# Altium PCB PCB.PcbDoc
Units mil, origin at the board's own origin, x right, y up, seen from the top; angles counter-clockwise.
Board outline 2285 x 2795 mil, 2 copper layers (Top Layer, Bottom Layer); 9 components, 12 nets, 89 pads, 0 vias.
Unrouted connection lines stored in the file: 2.
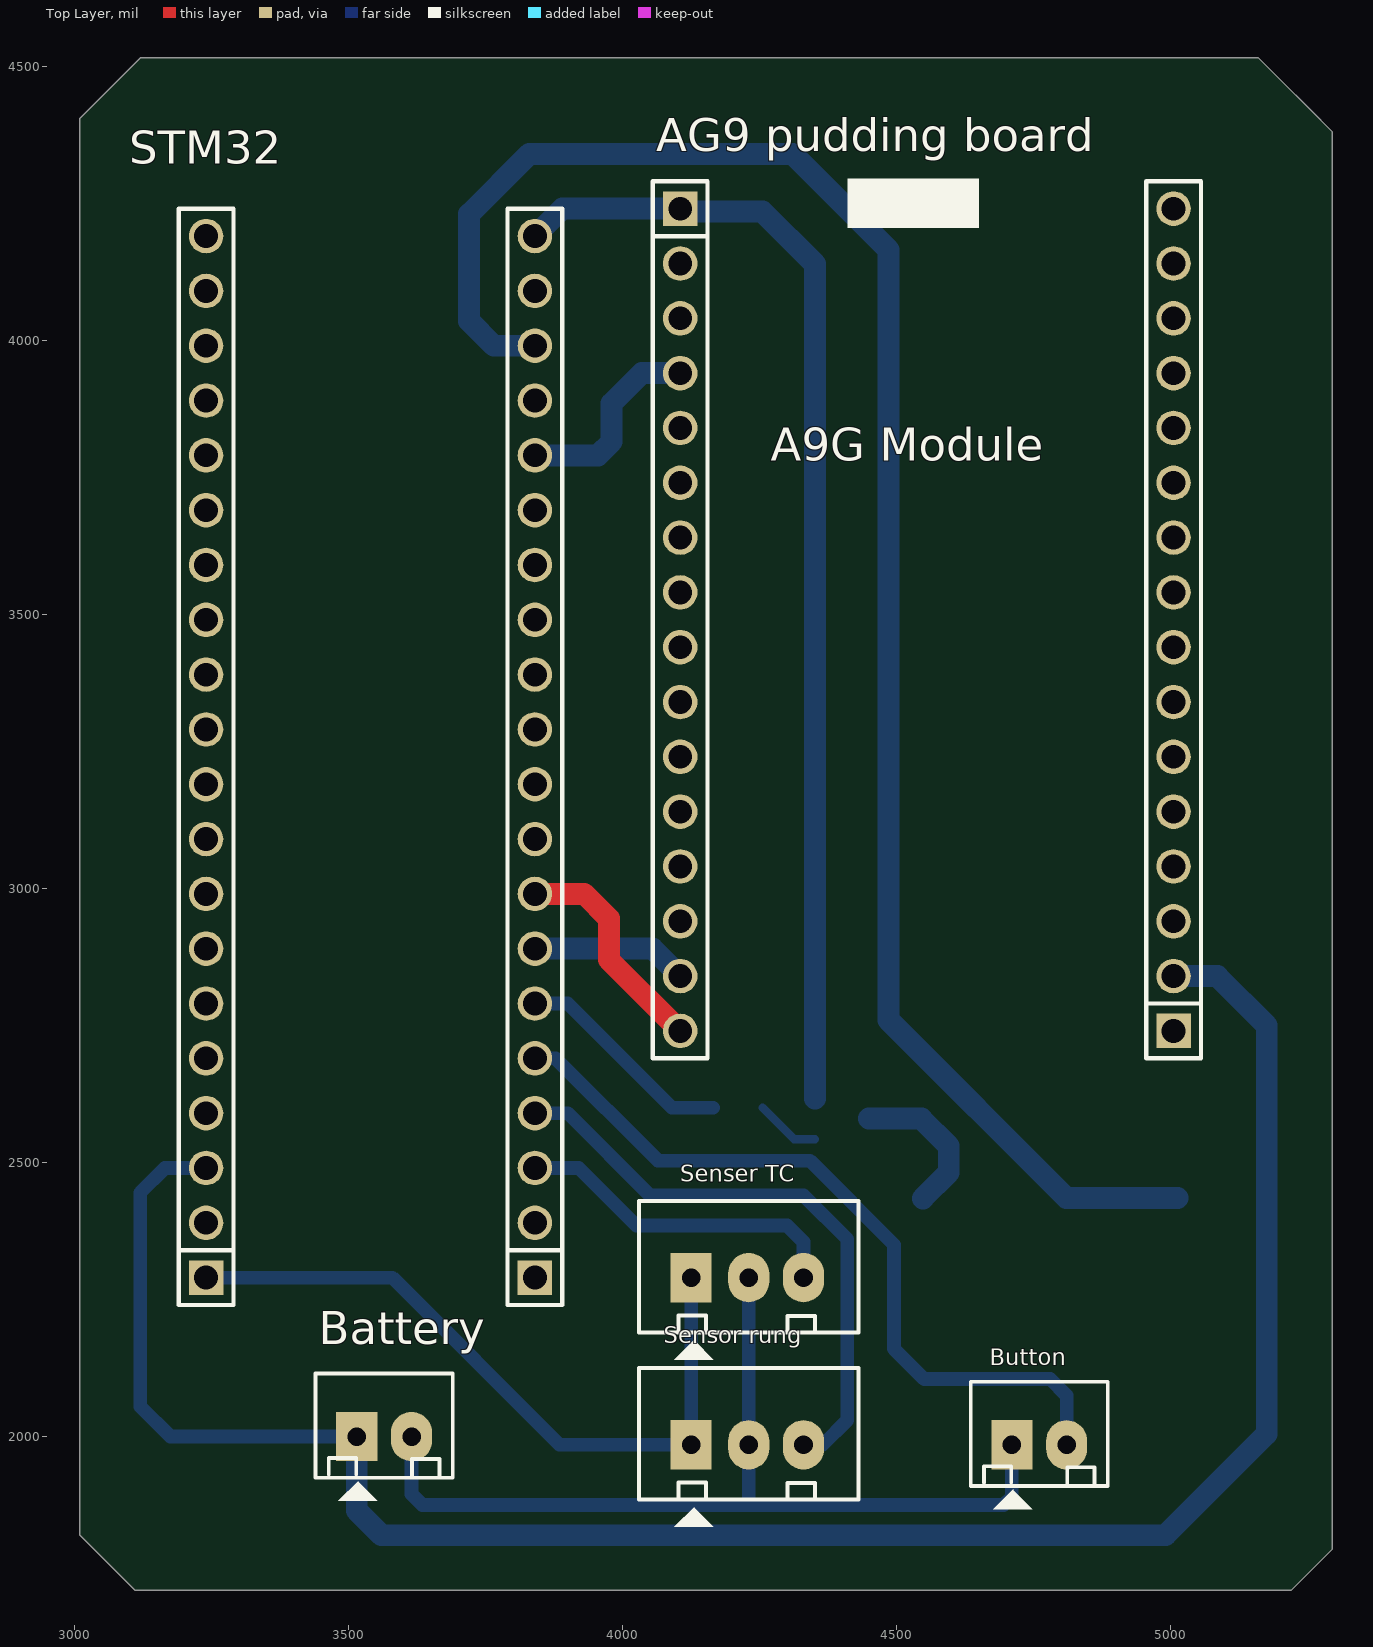
[diagram p0: Top Layer view]
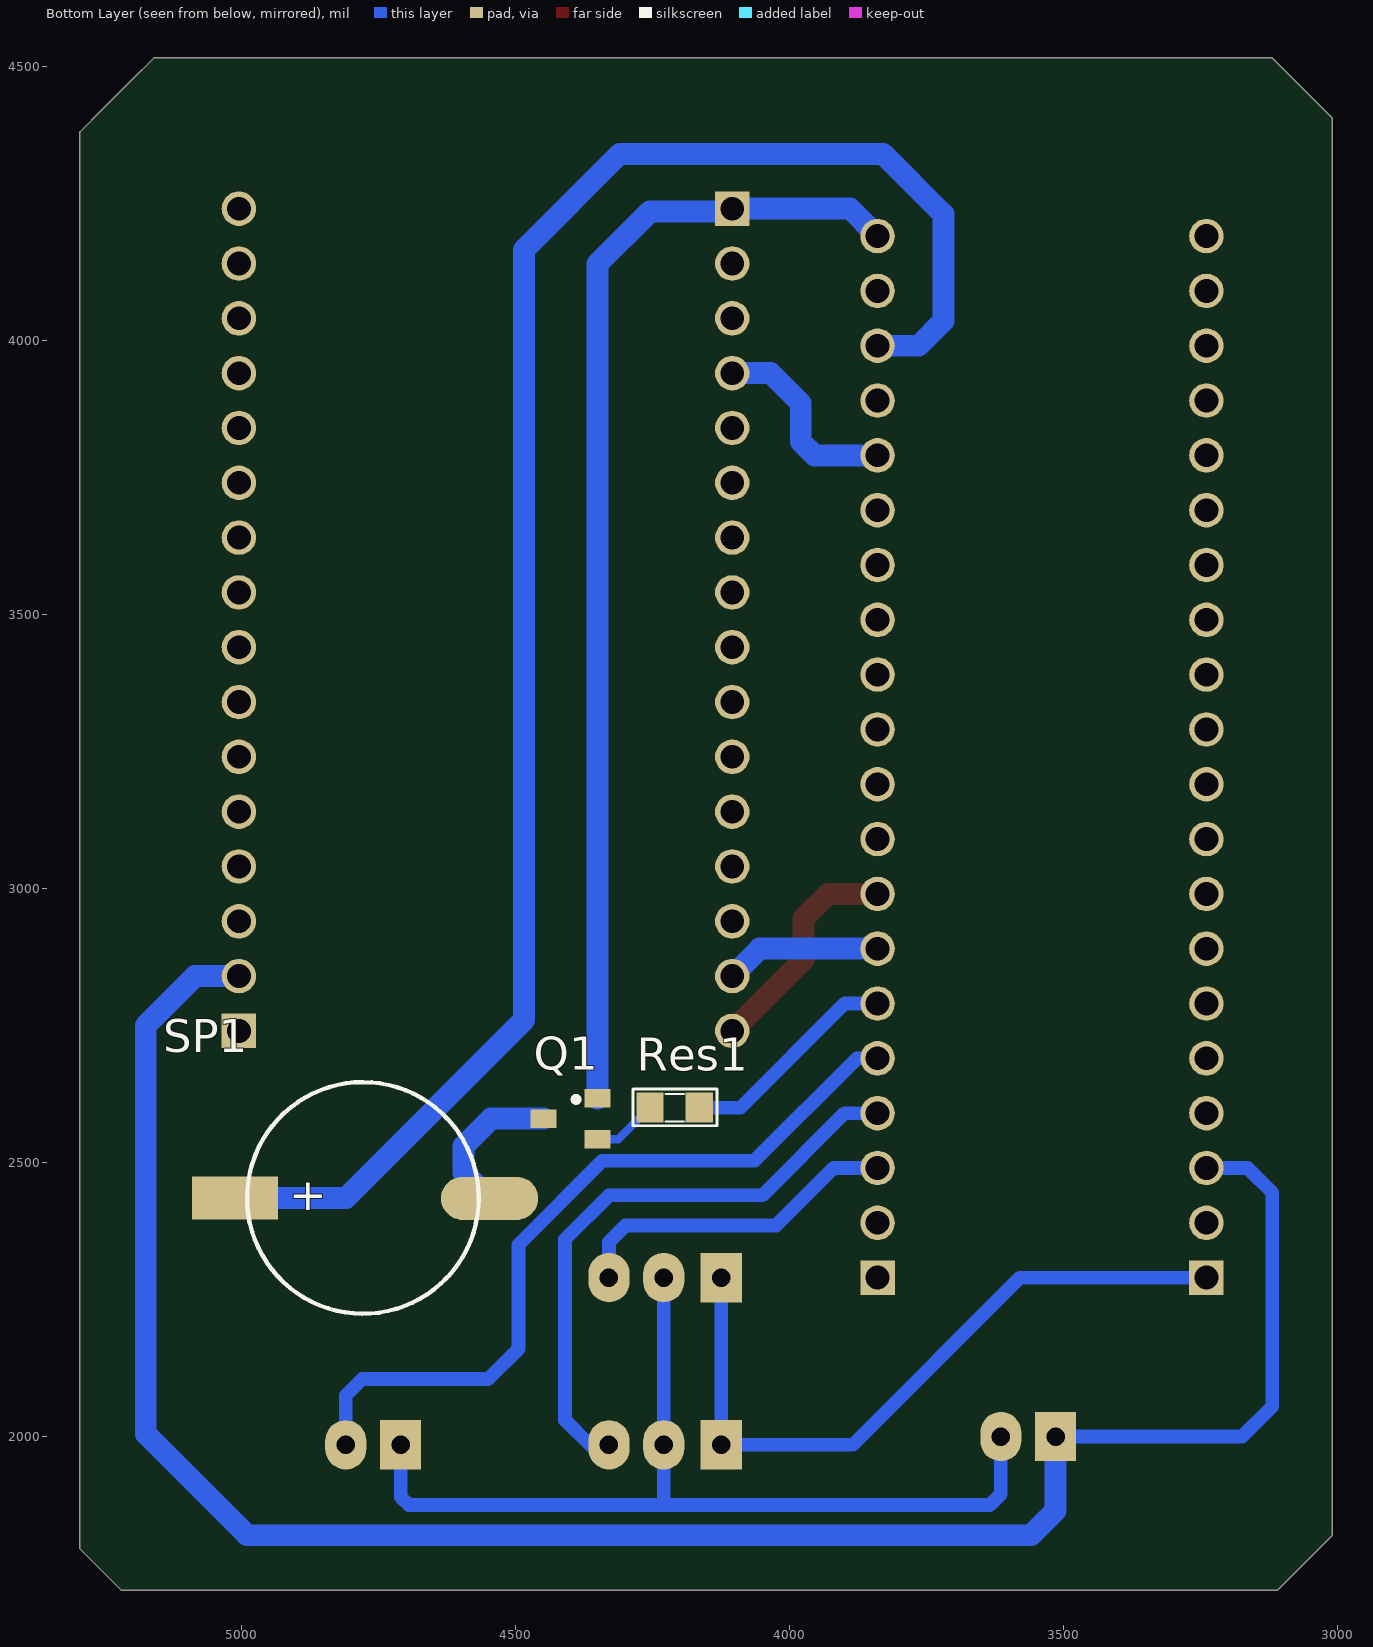
[diagram p1: Bottom Layer view, seen from below]
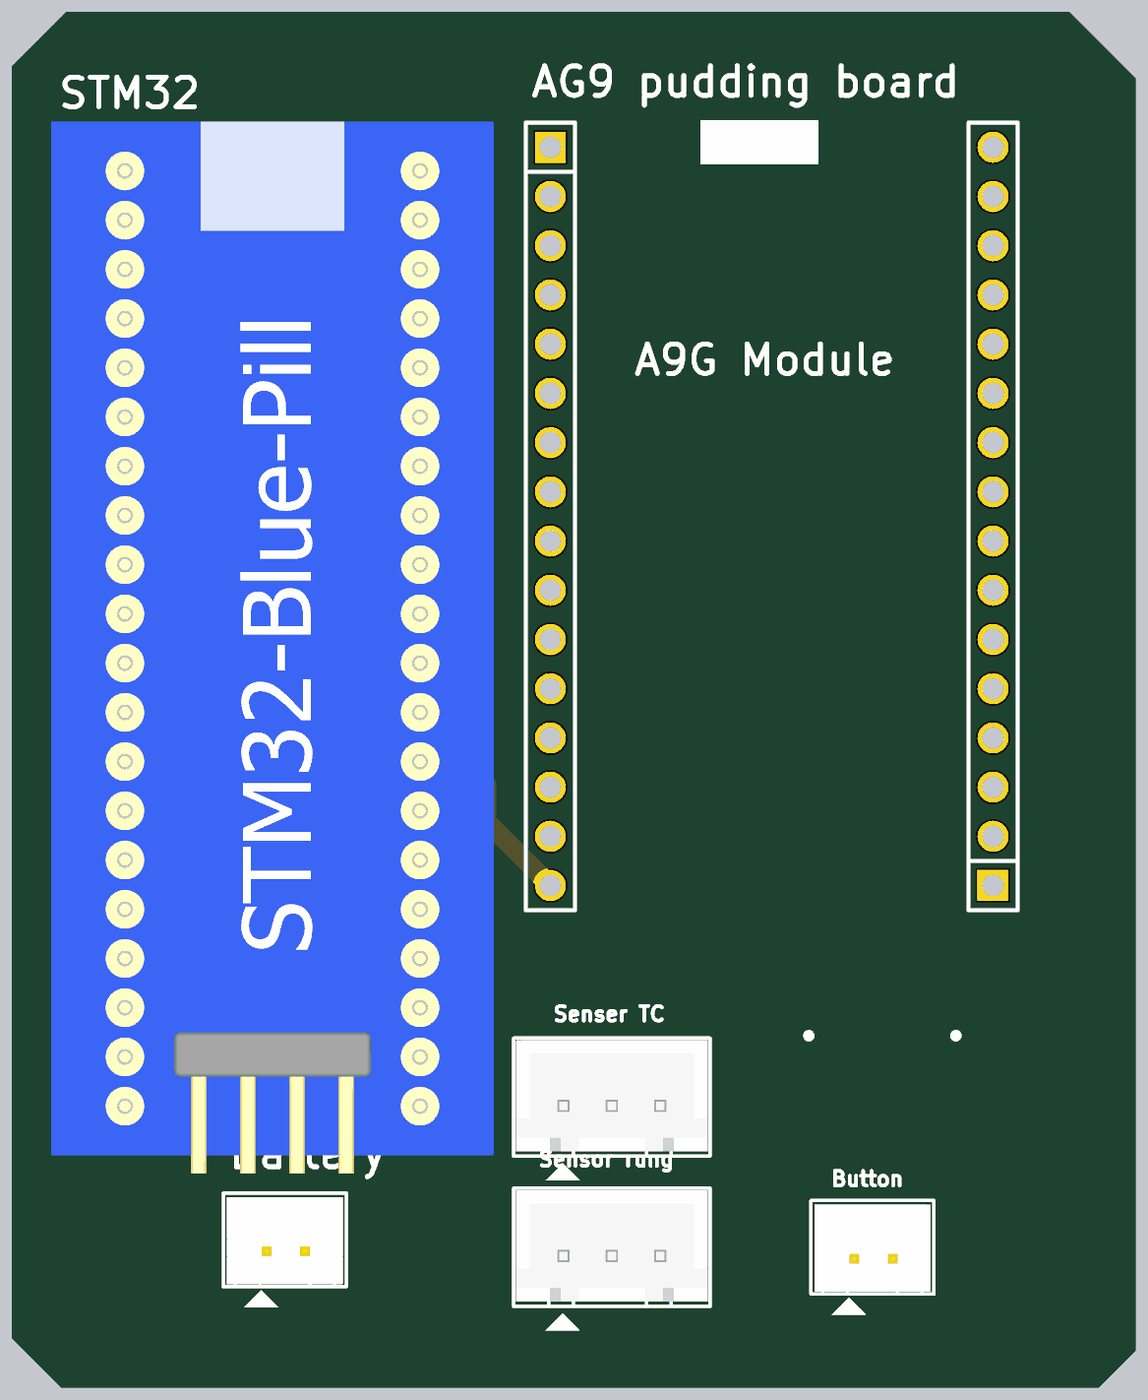
[diagram p2: 3D render of the assembled board from above, using the file's embedded part models]
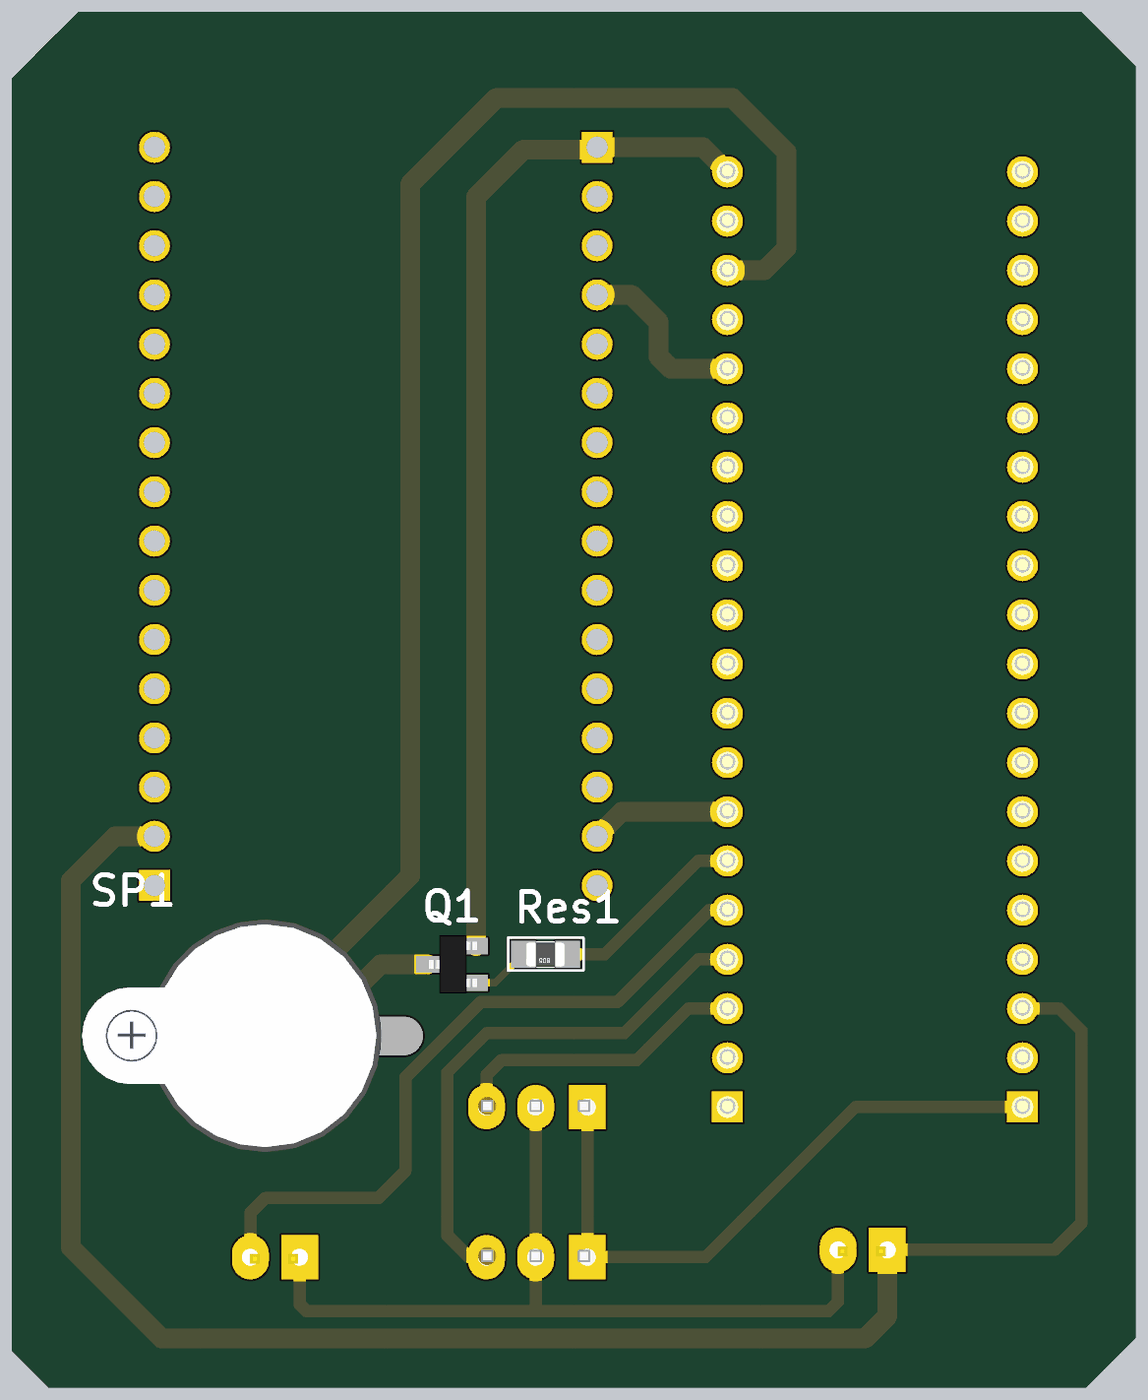
[diagram p3: 3D render of the assembled board from below, using the file's embedded part models]

## Layer stack, top to bottom
Top Solder: solder mask 0.4, Solder Resist, Dk 3.5
Top Layer: signal copper 1.4
Dielectric 1: dielectric 12.6, FR-4, Dk 4.8
Bottom Layer: signal copper 1.4
Bottom Solder: solder mask 0.4, Solder Resist, Dk 3.5

## Board outline
3010,1820 3110,1720 5220,1720 5295,1795 5295,4380 5253.75,4421.25 5201.25,4473.75 5160,4515 3120,4515 3010,4405

## Design rules (kind name [scope] priority, off if disabled: settings)
Clearance [All] p1: gap=10 ignorepadtopadclearanceinfootprint=FALSE except(0: Arc-Hole Track-Hole SMDPad-Hole THPad-Hole Via-Hole Fill-Hole Poly-Hole Region-Hole Text-Hole)
PolygonConnect [All] p1: connectstyle=Relief reliefconductorwidth=10 reliefentries=4 polygonreliefangle="90 Angle" airgapwidth=10
RoutingVias [All] p1: holewidth=28 width=50 viastyle="Through Hole" minholewidth=28 minwidth=50 maxholewidth=28 maxwidth=50
SolderMaskExpansion [All] p1: expansion=4
Width [All] p1: maxlimit=40 minlimit=15 preferedwidth=25 minimp=50.000000 maximp=50.000000 favimp=50.000000
30 further rules are at their usual default settings.

## Components (designator, comment, footprint, x,y, rotation, side; value= is the part's Value field where it differs from the comment)
"AG9 pudding board" "A9G Puding Board" "Pudding Board Sim A9G" 4475,3505 r180 top
Battery "" Header2 3515,2000 r0 top
Button "" Header2 4710,1985 r0 top
Q1 "C1815" SOT23B 4400,2580 r90 bottom
Res1 "1k" SM-RES-0805 4165,2600 r0 bottom value="R1/4W - 1K"
"Senser TC" "" Header3 4130,2290 r0 top
"Sensor rung" "" Header3 4130,1985 r0 top
SP1 "Speaker" Speaker 4780,2435 r0 bottom value="Speaker Chip"
STM32 "STM32 BluePill" PCBComponent_1 3535,2985 r180 top

## Footprints (in the part's own frame and the unit in brackets; to place one, negate y for a bottom-side part, rotate by r counter-clockwise, add the part's x,y. Pads: shape width x height; smd on the part's side, far side on the other; paste and mask are expansions set on the pad)
Header2 [mil] "CON2"
  rect 75x90 hole 34: 1(0,0)
  oval 75x90 hole 34: 2(100,0)
  silkscreen extent -75,-118 175,115, body extent -68,-70 168,107, height 236
Header3 [mil] "CON 3"
  rect 75x90 hole 34: 1(-5,0)
  oval 75x90 hole 34: 2(100,0) 3(200,0)
  silkscreen extent -100,-150 300,140, body extent -95,-90 295,136, height 276
PCBComponent_1 [mm]
  rect 1.6x1.6 hole 1.1: 1(-7.747,17.653) 40(7.493,17.653)
  round 1.6 hole 1.1: 2(-7.747,15.113) 3(-7.747,12.573) 4(-7.747,10.033) 5(-7.747,7.493) 6(-7.747,4.953) 7(-7.747,2.413) 8(-7.747,-0.127) 9(-7.747,-2.667) 10(-7.747,-5.207) 11(-7.747,-7.747) 12(-7.747,-10.287) 13(-7.747,-12.827) 14(-7.747,-15.367) 15(-7.747,-17.907) 16(-7.747,-20.447) 17(-7.747,-22.987) 18(-7.747,-25.527) 19(-7.747,-28.067) 20(-7.747,-30.607) 21(7.493,-30.607) 22(7.493,-28.067) 23(7.493,-25.527) 24(7.493,-22.987) 25(7.493,-20.447) 26(7.493,-17.907) 27(7.493,-15.367) 28(7.493,-12.827) 29(7.493,-10.287) 30(7.493,-7.747) 31(7.493,-5.207) 32(7.493,-2.667) 33(7.493,-0.127) 34(7.493,2.413) 35(7.493,4.953) 36(7.493,7.493) 37(7.493,10.033) 38(7.493,12.573) 39(7.493,15.113)
  silkscreen extent -9.02,-31.88 8.76,18.92, body extent -11.56,-33.19 11.3,21.08, height 5.08
"Pudding Board Sim A9G" [mm]
  rect 1.6x1.6 hole 1.1: 1(-13.462,19.431) 32(9.398,-18.669)
  round 1.6 hole 1.1: 2(-13.462,16.891) 3(-13.462,14.351) 4(-13.462,11.811) 5(-13.462,9.271) 6(-13.462,6.731) 7(-13.462,4.191) 8(-13.462,1.651) 9(-13.462,-0.889) 10(-13.462,-3.429) 11(-13.462,-5.969) 12(-13.462,-8.509) 13(-13.462,-11.049) 14(-13.462,-13.589) 15(-13.462,-16.129) 16(-13.462,-18.669) 17(9.398,19.431) 18(9.398,16.891) 19(9.398,14.351) 20(9.398,11.811) 21(9.398,9.271) 22(9.398,6.731) 23(9.398,4.191) 24(9.398,1.651) 25(9.398,-0.889) 26(9.398,-3.429) 27(9.398,-5.969) 28(9.398,-8.509) 29(9.398,-11.049) 30(9.398,-13.589) 31(9.398,-16.129)
  silkscreen extent -14.73,-20.07 10.67,20.7
SM-RES-0805 [mil]
  rect 50x55 smd: 1(0,0) 2(90,0)
  silkscreen extent -32,-34 121,33, body extent 6,-25 84,25, height 31
SOT23B [mm] "SOT 23B"
  rect 0.85x1.2 smd: 1(0.94,-1.245) 2(0,1.25) 3(-0.95,-1.25)
  silkscreen extent 0.77,-0.38 1.02,-0.13, body extent -1.5,-1.3 1.5,1.2, height 1.06
Speaker [mm]
  rect 4x2 smd: 1(5.9,0)
  oval 4.5x2 smd: 2(-5.9,0.013)
  silkscreen extent -5.4,-5.38 5.34,5.36, body extent -6,-6 9.45,6, height 9.65

## Part data
Battery Button: library part Header2, "Header IDC, 2 x 1 Pin Vertical 2.54mm Pitch (Non-Boxed, Male)", Manufacturer="Würth Elektronik eiSos GmbH", partNo=613002143121, ComponentLink1 Description=Manufacturer, ComponentLink1URL=http://www.we-online.com, ComponentLink2 Description=Datasheet, ComponentLink2URL=http://katalog.we-online.de/em/datasheet/6130xx143121.pdf, Created by="Karrer Zheng", Created Date="29 March 2013", NoPins=02
Q1: "NPN 600mW, ECB", =C2383
Res1: library part R1/4W, "Resistor 1/4W"
"Senser TC" "Sensor rung": library part Header3, "Header IDC, 3 x 1 Pin Vertical 2.54mm Pitch (Non-Boxed, Male)", Manufacturer="Würth Elektronik eiSos GmbH", partNo=613002143121, ComponentLink1 Description=Manufacturer, ComponentLink1URL=http://www.we-online.com, ComponentLink2 Description=Datasheet, ComponentLink2URL=http://katalog.we-online.de/em/datasheet/6130xx143121.pdf, Created by="Karrer Zheng", Created Date="29 March 2013", NoPins=02
SP1: library part SPK, "Speaker Chip"

## Nets (pads, with @x,y where several pads share a name; then routed paths per layer and width w, separated by ;. In a path a pad name is that pad's centre, name@x,y a point inside that pad or via, vN(x,y) a via of type N, cw(c..) or ccw(c..) an arc to the next point about the centre after c; other vN are vias at no path point)
3.3V: "Senser TC.1" "Sensor rung.1" SP1.1 STM32.18 STM32.40 | length 4599.9
  Bottom Layer w25: STM32.40 3580,2290 3885,1985 4125,1985 4125,2290
  Bottom Layer w40: STM32.18 3765,3990 3720,4035 3720,4230 3830,4340 4310,4340 4485,4165 4485,2760 4810,2435 SP1.1
4.2V: "AG9 pudding board.2" Battery.1 STM32.38 | length 3789
  Bottom Layer w25: STM32.38 3165,2490 3120,2445 3120,2055 3175,2000 Battery.1
  Bottom Layer w40: Battery.1 3515,1865 3560,1820 4990,1820 5175,2005 5175,2750 5085,2840 5005,2840
BT1: Button.2 STM32.5 | length 1426
  Bottom Layer w25: STM32.5 3877.6,2690 4064.23,2503.37 4341.63,2503.37 4495,2350 4495,2160 4550,2105 4780,2105 4810,2075 Button.2
Buzzer: Res1.1 STM32.6 | length 403.7
  Bottom Layer w25: STM32.6 3900,2790 4090,2600 Res1.1
GND: "AG9 pudding board.32" "Senser TC.2" "Sensor rung.2" Battery.2 Button.1 Q1.1 STM32.20 | length 3822.1
  Bottom Layer w25: Battery.2 3615,1895 3635,1875 4225,1875 ; 4230,2290 4230,1985 4230,1880 4225,1875 ; Button.1 4710,1890 4695,1875 4225,1875
  Bottom Layer w40: STM32.20 3890,4240 4105,4240 4110,4235 4255,4235 4351,4139 Q1.1
NetQ1_2: Q1.2 SP1.2 | length 281.6
  Bottom Layer w40: Q1.2 4545,2580 4595,2530 4595,2481.77 SP1.2
NetQ1_3: Q1.3 Res1.2 | length 119.6
  Bottom Layer w15: Res1.2 4312.4,2542.6 Q1.3
OUT_Rung: "Sensor rung.3" STM32.4 | length 1093.9
  Bottom Layer w25: STM32.4 3900,2590 4050,2440 4330,2440 4410,2360 4410,2030 4365,1985 4330,1985
OUT_TC: "Senser TC.3" STM32.3 | length 610.9
  Bottom Layer w25: STM32.3 3920,2490 4025,2385 4300,2385 4330,2355 4330,2290
"POWER KEY": "AG9 pudding board.29" STM32.16 | length 368.1
  Bottom Layer w40: STM32.16 3955,3790 3980,3815 3980,3885 4035,3940 4105,3940
RX_STM: "AG9 pudding board.17" STM32.8 | length 412.5
  Top Layer w40: STM32.8 3930,2990 3975,2945 3975,2870 4105,2740
TX_STM: "AG9 pudding board.18" STM32.7 | length 285.7
  Bottom Layer w40: STM32.7 4055,2890 4105,2840
pads on no net: "AG9 pudding board.1" "AG9 pudding board.3" "AG9 pudding board.4" "AG9 pudding board.5" "AG9 pudding board.6" "AG9 pudding board.7" "AG9 pudding board.8" "AG9 pudding board.9" "AG9 pudding board.10" "AG9 pudding board.11" "AG9 pudding board.12" "AG9 pudding board.13" "AG9 pudding board.14" "AG9 pudding board.15" "AG9 pudding board.16" "AG9 pudding board.19" "AG9 pudding board.20" "AG9 pudding board.21" "AG9 pudding board.22" "AG9 pudding board.23" "AG9 pudding board.24" "AG9 pudding board.25" "AG9 pudding board.26" "AG9 pudding board.27" "AG9 pudding board.28" "AG9 pudding board.30" "AG9 pudding board.31" STM32.1 STM32.2 STM32.9 STM32.10 STM32.11 STM32.12 STM32.13 STM32.14 STM32.15 STM32.17 STM32.19 STM32.21 STM32.22 STM32.23 STM32.24 STM32.25 STM32.26 STM32.27 STM32.28 STM32.29 STM32.30 STM32.31 STM32.32 STM32.33 STM32.34 STM32.35 STM32.36 STM32.37 STM32.39

## Silkscreen, mask and mechanical layers (free items; w line width, h text height)
Drill Drawing:
  the board outline again, w10

## Text inside footprints (layer, text, board x,y; h text height)
"AG9 pudding board": Top Overlay "A9G Module" at 4270,3780 h60
SP1: Bottom Overlay "+" at 4912.86,2463 h60 r180